# Altium PCB HVPowerModule_Old.PcbDoc
Units mm, origin at the board's own origin, x right, y up, seen from the top; angles counter-clockwise.
Board outline 55 x 90 mm, 2 copper layers (Top Layer, Bottom Layer); 63 components, 34 nets, 257 pads, 461 vias.
Unrouted connection lines stored in the file: 2.
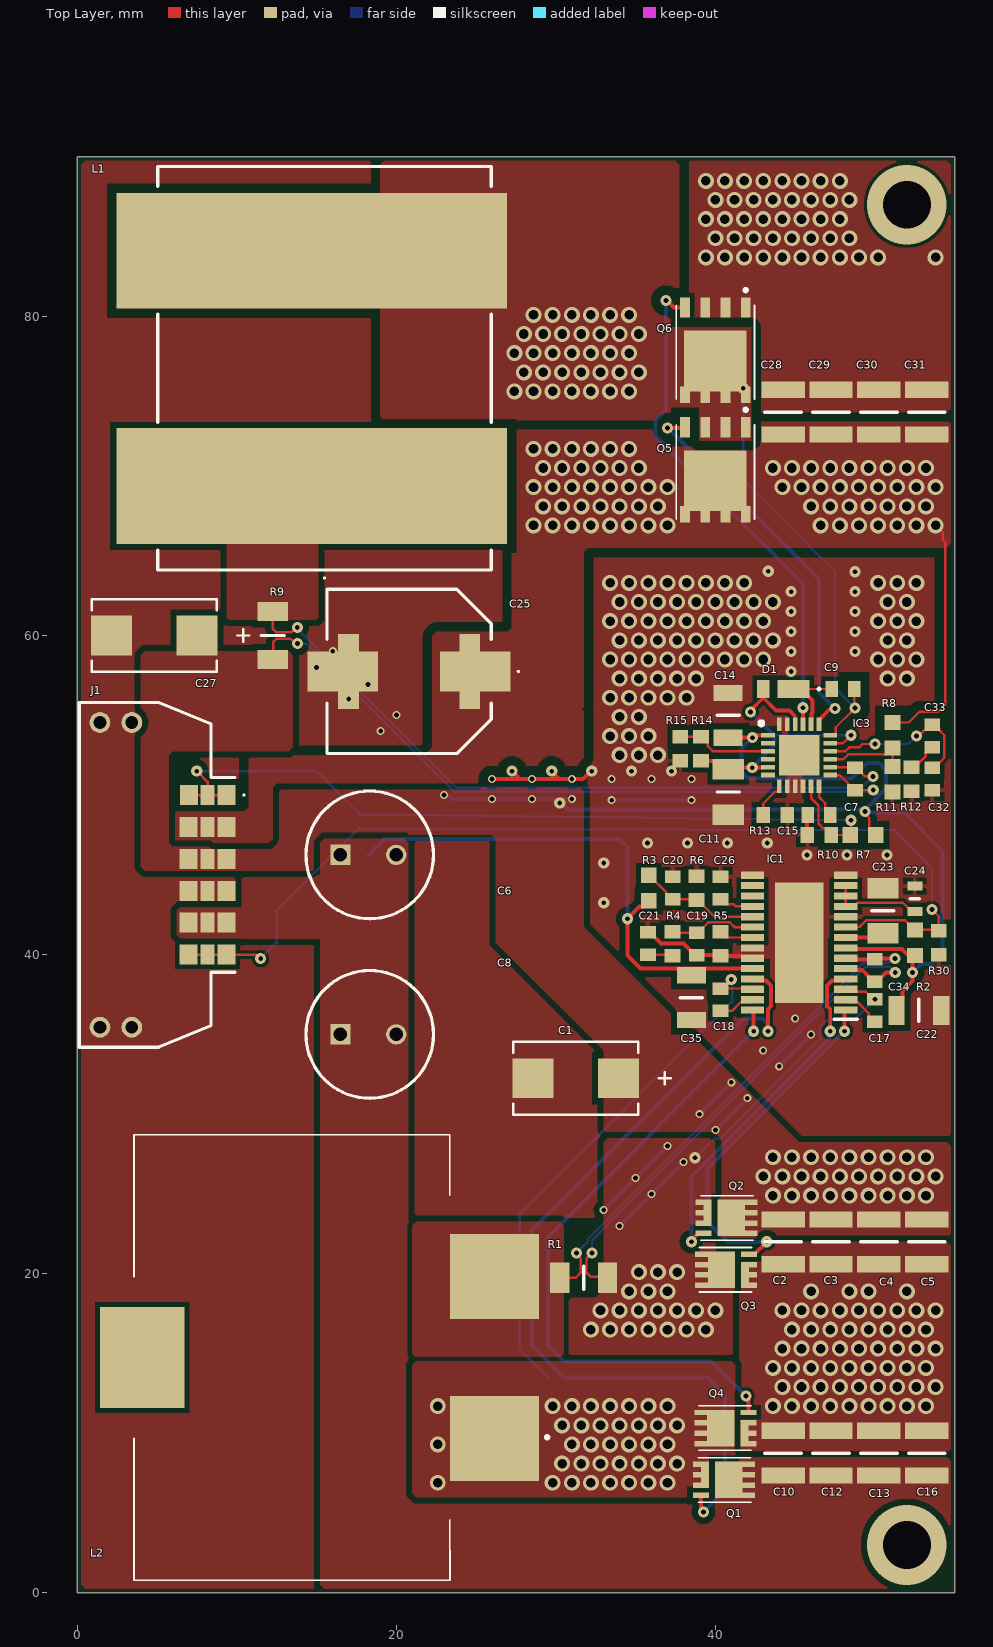
[diagram p0: Top Layer view]
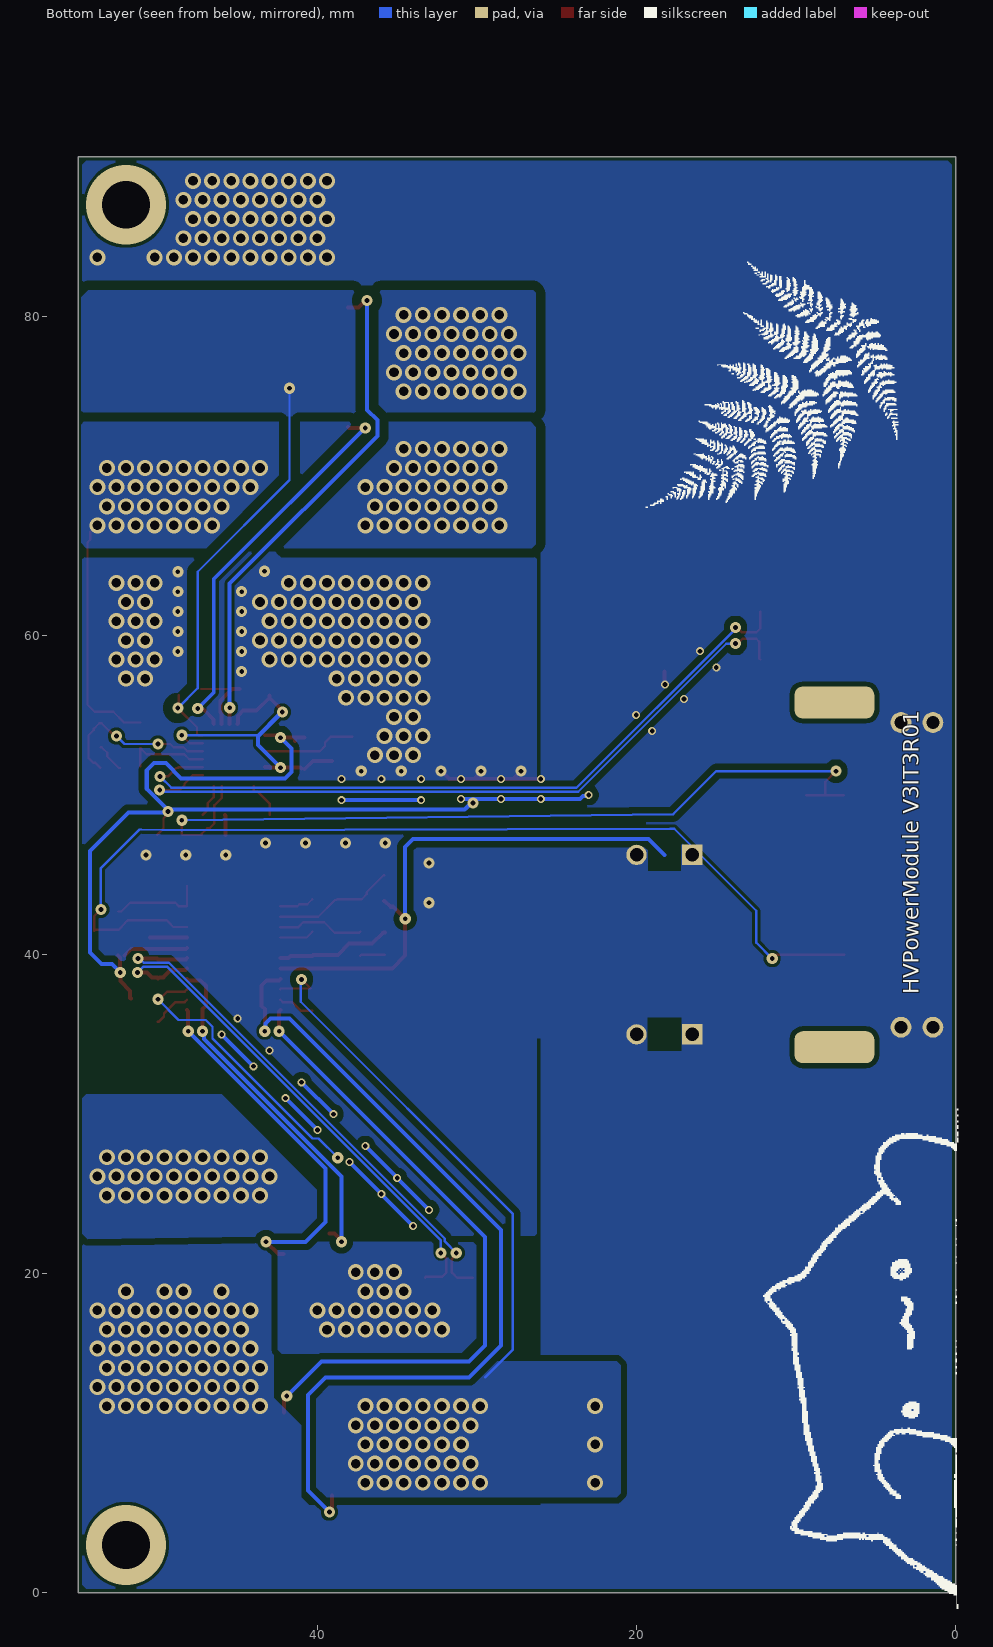
[diagram p1: Bottom Layer view, seen from below]
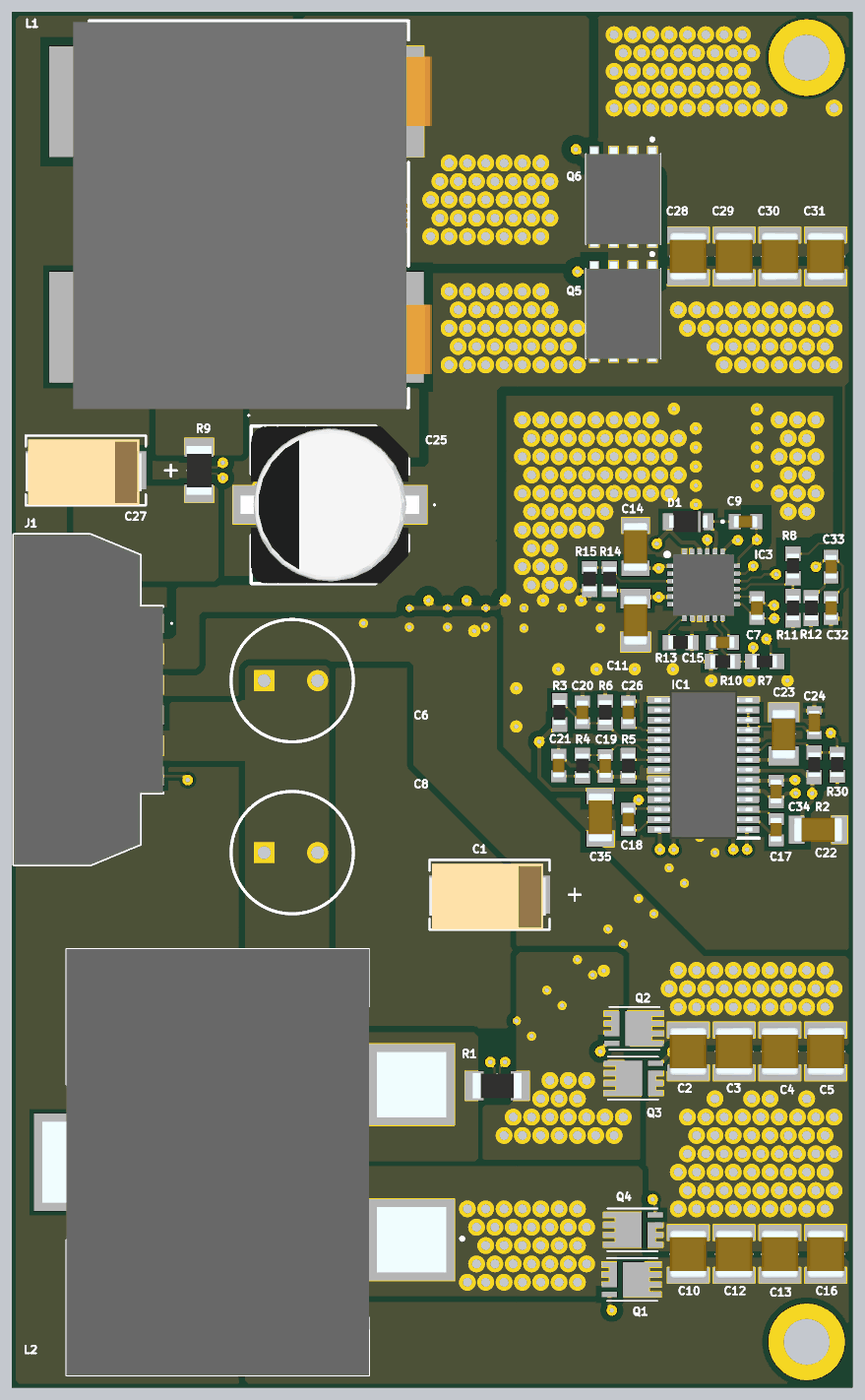
[diagram p2: 3D render of the assembled board from above, using the file's embedded part models]

## Layer stack, top to bottom
Top Solder: solder mask 0.0102, Solder Resist, Dk 3.5
Top Layer: signal copper 0.0356
Dielectric 1: dielectric 0.32, FR-4, Dk 4.8
Bottom Layer: signal copper 0.0356
Bottom Solder: solder mask 0.0102, Solder Resist, Dk 3.5

## Board outline
0,0 55,0 55,90 0,90

## Design rules (kind name [scope] priority, off if disabled: settings)
Clearance "Plane Clearance" [InNamedPolygon('PLANE')] p1: gap=0.8 ignorepadtopadclearanceinfootprint=TRUE
Clearance "High voltage Clearance 1" [InNetClass('HV1') vs Not InNetClass('HV2')] p2: gap=0.4 ignorepadtopadclearanceinfootprint=TRUE except(0.1: Arc-Text Track-Text SMDPad-Text THPad-Text Via-Text Fill-Text Poly-Text Region-Text Text-Text Text-Hole; 0.2: Arc-Arc Arc-Track Arc-SMDPad Arc-THPad Arc-Via Arc-Hole Track-Track Track-SMDPad Track-THPad Track-Via Track-Hole SMDPad-SMDPad SMDPad-THPad SMDPad-Via SMDPad-Hole THPad-THPad THPad-Via THPad-Hole Via-Via Via-Hole)
Clearance "High High voltage Clearance 1" [InNetClass('HHV1') vs Not InNetClass('HHV2')] p3: gap=0.6 ignorepadtopadclearanceinfootprint=TRUE except(0.1: Arc-Text Track-Text SMDPad-Text THPad-Text Via-Text Fill-Text Poly-Text Region-Text Text-Text Text-Hole; 0.2: Arc-SMDPad Arc-THPad Track-SMDPad Track-THPad SMDPad-SMDPad SMDPad-THPad THPad-THPad; 0.3: Arc-Arc Arc-Track Track-Track; 0.4: Arc-Via Arc-Hole Track-Via Track-Hole SMDPad-Via SMDPad-Hole THPad-Via THPad-Hole Via-Via Via-Hole)
Clearance "High High voltage Clearance 2" [InNetClass('HHV2') vs Not InNetClass('HHV1')] p4: gap=0.6 ignorepadtopadclearanceinfootprint=TRUE except(0.1: Arc-Text Track-Text SMDPad-Text THPad-Text Via-Text Fill-Text Poly-Text Region-Text Text-Text Text-Hole; 0.2: Arc-SMDPad Arc-THPad Track-SMDPad Track-THPad SMDPad-SMDPad SMDPad-THPad THPad-THPad; 0.3: Arc-Arc Arc-Track Track-Track; 0.4: Arc-Via Arc-Hole Track-Via Track-Hole SMDPad-Via SMDPad-Hole THPad-Via THPad-Hole Via-Via Via-Hole)
Clearance "High voltage Clearance 2" [InNetClass('HV2') vs Not InNetClass('HV1')] p5: gap=0.4 ignorepadtopadclearanceinfootprint=TRUE except(0.1: Arc-Text Track-Text SMDPad-Text THPad-Text Via-Text Fill-Text Poly-Text Region-Text Text-Text; 0.2: Arc-Arc Arc-Track Arc-SMDPad Arc-THPad Arc-Via Arc-Hole Track-Track Track-SMDPad Track-THPad Track-Via Track-Hole SMDPad-SMDPad SMDPad-THPad SMDPad-Via SMDPad-Hole THPad-THPad THPad-Via THPad-Hole Via-Via Via-Hole Text-Hole)
Clearance [All] p6: gap=0.1 ignorepadtopadclearanceinfootprint=TRUE except(0.2: Arc-Fill Arc-Poly Arc-Region Track-Fill Track-Poly Track-Region Via-Fill Via-Poly Via-Region; 0.3: SMDPad-Fill SMDPad-Poly SMDPad-Region THPad-Fill THPad-Poly THPad-Region Fill-Fill Fill-Poly Fill-Region Poly-Poly Poly-Region Region-Region)
HoleSize [All] p1: absolutevalues=TRUE maxlimit=5 minlimit=0.2 maxpercent=80.000 minpercent=20.000
HoleToHoleClearance [All] p1: gap=0.4 allowstackedmicrovias=TRUE
MinimumSolderMaskSliver [All] p1: minsoldermaskwidth=0.05
PlaneConnect [All] p1: planeconnectstyle=Direct reliefexpansion=0.508 reliefentries=4 reliefconductorwidth=0.254 reliefairgap=0.254
PolygonConnect [HasFootprint('*C1608*')] p1: connectstyle=Relief reliefconductorwidth=0.254 reliefentries=4 polygonreliefangle="90 Angle" airgapwidth=0.254
PolygonConnect PolygonConnect_1 [All] p2: connectstyle=Direct reliefconductorwidth=0.254 reliefentries=4 polygonreliefangle="90 Angle" airgapwidth=0.254
RoomDefinition Module [InComponentClass('Module')] p1: confinementstyle=ConfineIn formatcopy=TRUE lockcomponents=FALSE outline -3.25,-1 57.75,-1 57.75,92.75 -3.25,92.75
RoomDefinition 48V [InComponentClass('48V')] p2: confinementstyle=ConfineIn formatcopy=TRUE lockcomponents=FALSE outline -3,-1.5 57.5,-1.5 57.5,92.5 -3,92.5
RoomDefinition 24V [InComponentClass('24V')] p3: confinementstyle=ConfineIn formatcopy=TRUE lockcomponents=FALSE outline -3.25,-1.25 57.5,-1.25 57.5,92.5 -3.25,92.5
RoutingVias [All] p1: holewidth=0.711 width=1.27 viastyle="Through Hole" minholewidth=0.2 minwidth=0.4 maxholewidth=0.711 maxwidth=1.27
SilkToSilkClearance [All] p1: silktosilkclearance=0.2
SilkToSolderMaskClearance [IsPad] p1: minsilkscreentomaskgap=0.1 clearancetoexposedcopper=TRUE
SolderMaskExpansion [All] p1: expansion=0.05 istentingtop=FALSE
Width [All] p1: maxlimit=2 minlimit=0.1 preferedwidth=0.254
24 further rules are at their usual default settings.

## Classes and differential pairs
net class HV2: LSN S+
component class 48V: C7 C9 C11 C14 C15 C25 C27 C28 C29 C30 C31 C32 C33 D1 IC3 L1 Q5 Q6 R7 R8 R9 R10 R11 R12 R13 R14 R15
net class HHV2: 48V SW
net class HV1: 24V 48V_CTRL SW1 SW2 V_bat
component class Module: J1
component class 24V: C1 C2 C3 C4 C5 C6 C8 C10 C12 C13 C16 C17 C18 C19 C20 C21 C22 C23 C24 C26 C34 C35 IC1 L2 Q1 Q2 Q3 Q4 R1 R2 R3 R4 R5 R6 R30

## Components (designator, comment, footprint, x,y, rotation, side; value= is the part's Value field where it differs from the comment)
C1 "T598D336M035ATE065" CAPMP7.6X4.3_3.1N_KEM 31.25,32.25 r180 top value=33u
C2 "CGA6P1X7R1N106M250AC" CAPC3225X280N 44.25,22 r90 top value=10u
C3 "CGA6P1X7R1N106M250AC" CAPC3225X280N 47.25,22 r90 top value=10u
C4 "CGA6P1X7R1N106M250AC" CAPC3225X280N 50.25,22 r90 top value=10u
C5 "CGA6P1X7R1N106M250AC" CAPC3225X280N 53.25,22 r90 top value=10u
C6 "A750MW687M1VAAE018" CAPPRD500W65D1000H1800 18.25,46.25 r0 top value=680u
C7 "C0603C102J5RACTU" CAPC1608X95N 48.75,51 r90 top value=1n
C8 "A750MW687M1VAAE018" CAPPRD500W65D1000H1800 18.25,35 r0 top value=680u
C9 "C0603C104K5RACTU" CAPC1608X95N 48,56.65 r0 top value=100n
C10 "CGA6P1X7R1N106M250AC" CAPC3225X280N 44.25,8.75 r270 top value=10u
C11 "C1206X475M5RACAUTO" CAPC3316X195N 40.8,50.2 r270 top value=4.7uF
C12 "CGA6P1X7R1N106M250AC" CAPC3225X280N 47.25,8.75 r270 top value=10u
C13 "CGA6P1X7R1N106M250AC" CAPC3225X280N 50.25,8.75 r270 top value=10u
C14 "C1206C105M5RECTU" CAPC3216X130N 40.8,55 r90 top value=1uF
C15 "C0603C104K5RACTU" CAPC1608X95N 46.5,48.75 r180 top value=100n
C16 "CGA6P1X7R1N106M250AC" CAPC3225X280N 53.25,8.75 r270 top value=10u
C17 "C0603C104K5RACTU" CAPC1608X95N 50,36.5 r90 top value=100n
C18 "C0603C104K5RACTU" CAPC1608X95N 40.325,37.175 r270 top value=100n
C19 "C0603C689C5GACTU" CAPC1608X87N 38.825,40.675 r90 top value=6.8p
C20 "C0603C221K5RACTU" CAPC1608X87N 37.325,44.175 r270 top value=220p
C21 "C0603C102J5RACTU" CAPC1608X95N 35.775,40.7 r270 top value=1n
C22 "C1206C105M5RECTU" CAPC3216X130N 52.75,36.5 r0 top value=1uF
C23 "C1206X475M5RACAUTO" CAPC3316X195N 50.5,42.75 r90 top value=4.7uF
C24 "C0603C474K4PACTU" CAPC1608X90N 52.5,43.5 r90 top value=470n
C25 "EEH-ZS1J181UV" Hybrid_G_VP 20.8,57.75 r90 top
C26 "C0603C104K5RACTU" CAPC1608X95N 40.325,44.175 r270 top value=100n
C27 "T598D336M035ATE065" CAPMP7.6X4.3_3.1N_KEM 4.828,60 r180 top value=33u
C28 "CGA6P1X7R1N106M250AC" CAPC3225X280N 44.25,74 r270 top value=10u
C29 "CGA6P1X7R1N106M250AC" CAPC3225X280N 47.25,74 r270 top value=10u
C30 "CGA6P1X7R1N106M250AC" CAPC3225X280N 50.25,74 r270 top value=10u
C31 "CGA6P1X7R1N106M250AC" CAPC3225X280N 53.25,74 r270 top value=10u
C32 "C0603C221K5RACTU" CAPC1608X87N 53.6,51 r270 top value=220p
C33 "C0603C682K5RAC7411" CAPC1608X87N 53.6,53.7 r270 top value=6.8n
C34 "C0603C102J5RACTU" CAPC1608X95N 50,39 r270 top value=1n
C35 "C1206C105M5RECTU" CAPC3216X130N 38.5,37.3 r270 top value=1uF
D1 "RF05VYM1SFHTR" RF05VYM1SFHTR 44.25,56.65 r270 top
IC1 "LT8392JFE#PBF" SOP65P640X120-29N 45.25,40.75 r180 top
IC3 "LTC3769EUF#PBF" QFN50P400X400X80-25N-D 45.25,52.5 r0 top
J1 "UMPT-06-01-L-RA-WT-M-TR" UMPT0601LRAWTMTR 5,45 r270 top locked
L1 "B82559A9203A025" B82559A9203A025 15.5,76.75 r90 top value=20u
L2 "PQ2614BHA-100K" PQ2614BLA1R0K 15.5,14.75 r90 top value=10u
Q1 "BSZ034N04LS" BSZ060NE2LS 41.216,7.078 r180 top
Q2 "BSZ034N04LS" BSZ060NE2LS 41.37,23.5 r180 top
Q3 "BSZ034N04LS" BSZ060NE2LS 40,20.25 r0 top
Q4 "BSZ034N04LS" BSZ060NE2LS 39.966,10.328 r0 top
Q5 "SiR880ADP" SI7141DPT1GE3 40,70.25 r270 top
Q6 "SiR880ADP" SI7141DPT1GE3 40,77.75 r270 top
R1 "PCS1206FR0030ET" RESC3216X68N 31.75,19.75 r180 top value=3m
R2 "CRCW0603100KJNEAC" RESC1608X55N 52.5,40.75 r270 top value=100k
R3 "CRCW0603100KJNEAC" RESC1608X55N 35.825,44.175 r270 top value=100k
R4 "CRCW0603255KFKEAC" RESC1608X50N 37.325,40.675 r90 top value=255k
R5 "CRCW0603316KFKTA" RESC1608X50N 40.325,40.675 r90 top value=316k
R6 "CRCW06034K32FKEA" RESC1608X50N 38.825,44.175 r90 top value=4.32k
R7 "CRCW0603100KJNEAC" RESC1608X55N 49.25,47.5 r0 top value=100k
R8 "CRCW0603100KJNEAC" RESC1608X55N 51.1,53.75 r90 top value=100k
R9 "PCS1206FR0030ET" RESC3216X68N 12.25,60 r90 top value=3m
R10 "CRCW06038K87FKTA" RESC1608X50N 46.5,47.5 r0 top value=8.87k
R11 "CRCW06032K55FKTA" RESC1608X55N 51.1,51 r90 top value=2.55k
R12 "CRCW060315K8FKTA" RESC1608X50N 52.3,51 r270 top value=15.8k
R13 "CRCW060326K7FKEB" RESC1608X50N 43.75,48.75 r180 top value=8.87k
R14 "CRCW06030000Z0EAHP" RESC1608X50N 39.1,52.9 r270 top
R15 "CRCW06030000Z0EAHP" RESC1608X50N 37.8,52.9 r270 top
R30 "CRCW06038K87FKEA" RESC1608X50N 54,40.75 r90 top value=8.87k

## Footprints (in the part's own frame and the unit in brackets; to place one, negate y for a bottom-side part, rotate by r counter-clockwise, add the part's x,y. Pads: shape width x height; smd on the part's side, far side on the other; paste and mask are expansions set on the pad)
B82559A9203A025 [mm]
  rect 7.25x24.5 smd: 1(-7.375,0.8) 2(7.375,0.8)
  silkscreen extent -13.2,-10.45 12.65,10.45, body extent -12.73,-12 12.57,11.5, height 14.9
BSZ060NE2LS [mm]
  rect 0.8x0.34 smd: 1(-0.87,0.975) 2(-0.87,0.325) 3(-0.87,-0.325) 4(-0.87,-0.975)
  rect 1.71x2.29 smd: 1(0.38,0)
  rect 0.5x0.34 smd: 5(1.87,-0.65) 5(1.87,0)
  rect 1x0.34 smd: 5(2.12,-0.975) 6(2.12,-0.325) 7(2.12,0.325) 8(2.12,0.975)
  silkscreen extent -1.02,-1.4 2.29,1.4
CAPC1608X87N [mm]
  rect 0.78x0.98 smd: 1(-0.7,0) 2(0.7,0)
  body extent -0.8,-0.4 0.8,0.4, height 0.87
CAPC1608X90N [mm]
  rect 0.54x0.94 smd: 1(-0.8,0) 2(0.8,0)
  silkscreen extent 0,-0.3 0,0.3, body extent -0.8,-0.4 0.8,0.4, height 0.9
CAPC1608X95N [mm]
  rect 0.78x0.98 smd: 1(-0.7,0) 2(0.7,0)
  body extent -0.8,-0.4 0.8,0.4, height 0.95
CAPC3216X130N [mm]
  rect 1.02x1.82 smd: 1(-1.4,0) 2(1.4,0)
  silkscreen extent 0,-0.7 0,0.7, body extent -1.6,-0.8 1.6,0.8, height 1.3
CAPC3225X280N [mm]
  rect 1.02x2.72 smd: 1(-1.4,0) 2(1.4,0)
  silkscreen extent 0,-1.15 0,1.15, body extent -1.6,-1.25 1.6,1.25, height 2.8
CAPC3316X195N [mm]
  rect 1.28x1.96 smd: 1(-1.42,0) 2(1.42,0)
  silkscreen extent 0,-0.7 0,0.7, body extent -1.65,-0.8 1.65,0.8, height 1.95
CAPMP7.6X4.3_3.1N_KEM [mm]
  rect 2.56x2.5 smd paste+0 mask+0: 1(-2.672,0) 2(2.672,0)
  silkscreen extent -5.95,-2.28 3.93,2.28, body extent -3.67,-2.02 3.93,2.28, height 3.15
CAPPRD500W65D1000H1800 [mm]
  rect 1.275x1.275 hole 0.85: 1(-1.75,0)
  round 1.275 hole 0.85: 2(1.75,0)
  silkscreen extent -3.91,-4 4.09,4
Hybrid_G_VP [mm]
  rect 2.5x1.2 smd: 1(0,-2.55) 2(0,2.55)
  rect 4.7x1.3 smd: 1(0,-3.8) 2(0,3.8)
  rect 2.5x1.9 smd: 1(0,-5.4) 2(0,5.4)
  silkscreen extent -5.15,-6.9 5.15,5.15, body extent -5.15,-5.85 5.15,5.85, height 10.59
PQ2614BLA1R0K [mm]
  rect 5.33x5.59 smd: 1(-5.075,-10.655) 2(5.075,-10.655)
  rect 6.35x5.28 smd: MP1(0,11.42)
  silkscreen extent -13.95,-14.06 13.95,11.94, body extent -13.95,-12.92 13.95,13.53, height 16.1
QFN50P400X400X80-25N-D [mm]
  rect 0.85x0.3 smd mask+0.04: 1(-1.95,1.25) 6(-1.95,-1.25) 13(1.95,-1.25) 18(1.95,1.25)
  rect 0.85x0.3 smd: 2(-1.95,0.75) 3(-1.95,0.25) 4(-1.95,-0.25) 5(-1.95,-0.75) 14(1.95,-0.75) 15(1.95,-0.25) 16(1.95,0.25) 17(1.95,0.75)
  rect 0.3x0.85 smd mask+0.04: 7(-1.25,-1.95) 12(1.25,-1.95) 19(1.25,1.95) 24(-1.25,1.95)
  rect 0.3x0.85 smd: 8(-0.75,-1.95) 9(-0.25,-1.95) 10(0.25,-1.95) 11(0.75,-1.95) 20(0.75,1.95) 21(0.25,1.95) 22(-0.25,1.95) 23(-0.75,1.95)
  rect 2.55x2.55 smd: 25(0,0)
  silkscreen extent -2.5,1.88 -2.25,2.12, body extent -2.05,-2.05 2.05,2.05, height 0.8
RESC1608X50N [mm]
  rect 0.85x1 smd: 1(-0.75,0) 2(0.75,0)
  body extent -0.79,-0.43 0.79,0.43, height 0.5
RESC1608X55N [mm]
  rect 0.95x1 smd: 1(-0.8,0) 2(0.8,0)
  body extent -0.8,-0.4 0.8,0.4, height 0.55
RESC3216X68N [mm]
  rect 1.2x1.9 smd: 1(-1.5,0) 2(1.5,0)
  silkscreen extent 0,-0.72 0,0.72, body extent -1.6,-0.82 1.6,0.82, height 0.68
RF05VYM1SFHTR [mm]
  rect 1.1x2 smd: 1(0,0.65)
  rect 1.1x0.8 smd: 2(0,-1.25)
  silkscreen extent -0.05,2.2 0.05,2.3, body extent -0.7,-1.25 0.7,1.25, height 0.8
SI7141DPT1GE3 [mm]
  rect 1.27x0.61 smd: 1(-2.81,1.905) 2(-2.81,0.635) 3(-2.81,-0.635) 4(-2.81,-1.905)
  rect 0.71x0.61 smd: 5(2.81,-1.905) 6(2.81,-0.635) 7(2.81,0.635) 8(2.81,1.905)
  rect 3.81x3.91 smd: 9(0.55,0)
  rect 0.32x0.255 smd: 9(2.3,2.083) 9(2.3,-2.083)
  silkscreen extent -4,-2.45 2.95,2.45, body extent -3.38,-2.45 3.1,2.45, height 1.22
SOP65P640X120-29N [mm]
  rect 1.45x0.45 smd: 1(-2.925,4.225) 2(-2.925,3.575) 3(-2.925,2.925) 4(-2.925,2.275) 5(-2.925,1.625) 6(-2.925,0.975) 7(-2.925,0.325) 8(-2.925,-0.325) 9(-2.925,-0.975) 10(-2.925,-1.625) 11(-2.925,-2.275) 12(-2.925,-2.925) 13(-2.925,-3.575) 14(-2.925,-4.225) 15(2.925,-4.225) 16(2.925,-3.575) 17(2.925,-2.925) 18(2.925,-2.275) 19(2.925,-1.625) 20(2.925,-0.975) 21(2.925,-0.325) 22(2.925,0.325) 23(2.925,0.975) 24(2.925,1.625) 25(2.925,2.275) 26(2.925,2.925) 27(2.925,3.575) 28(2.925,4.225)
  rect 3.05x7.56 smd: 29(0,0)
  silkscreen extent -3.65,4.8 -2.2,4.8, body extent -3.2,-4.85 3.2,4.85, height 1.2
UMPT0601LRAWTMTR [mm]
  rect 1.25x1.12 smd: 1(-5,2) 1(-5,4.365) 2(-3,4.365) 2(-3,1.985) 3(-1,4.365) 3(-1,1.985) 4(1,4.365) 4(1,1.985) 5(3,4.365) 5(3,1.985) 6(5,1.985) 6(5,4.365)
  rect 1.25x0.86 smd: 1(-5,3.175) 2(-3,3.175) 3(-1,3.175) 4(1,3.175) 5(3,3.175) 6(5,3.175)
  round 1.3 hole 0.8: MH(-9.55,-3.575) MH(-9.55,-1.575) MH(9.55,-3.575) MH(9.55,-1.575)
  silkscreen extent -10.8,-4.87 10.8,5.5, body extent -10.8,-4.87 10.8,4.87, height 9.8

## Part data
C1 C27: "No Description Available", Supplier Part Number 1=80-T598D336M35E65, Built_By=EMA_Frank, Copyright="Copyright (C) 2018 Accelerated Designs. All rights reserved", Manufacturer_Part_Number=T598D336M035ATE065, RefDes=RefDes, Source_Library=Kemet_2020-03-25_3.xlr, SourceLibrary=Kemet_2020-03-25_3, Supplier 1=Mouser, Type=DEV, Vendor=Kemet
C2 C3 C4 C5 C10 C12 C13 C16 C28 C29 C30 C31: "Capacitor", Manufacturer_Name=TDK, Mouser Part Number=810-CGA6P1X7R1N106M, Arrow Part Number=CGA6P1X7R1N106M250AC, Arrow Price/Stock=https://www.arrow.com/en/products/cga6p1x7r1n106m250ac/tdk, Datasheet Link=https://product.tdk.com/system/files/dam/doc/product/capacitor/ceramic/mlcc/catalog/mlcc_automotive_general_en.pdf, Height=2.8mm, Manufacturer_Part_Number=CGA6P1X7R1N106M250AC, Mouser Price/Stock=https://www.mouser.co.uk/ProductDetail/TDK/CGA6P1X7R1N106M250AC?qs=gZXFycFWdANNyXbiENuK8Q%3D%3D, Supplier 1=Mouser, Supplier Part Number 1=810-CGA6P1X7R1N106M
C6 C8: "Capacitor Polarised", Manufacturer_Name=Kemet, Supplier Part Number 1=80-A750MW687M1VAAE18, Datasheet Link=https://www.kemet.com/specsheet/A750MW687M1VAAE018, Height=18mm, Manufacturer_Part_Number=A750MW687M1VAAE018, Supplier 1=Mouser
C7 C21 C34: library part C0603C104K5RACTU, "Capacitor", Manufacturer_Name=Kemet, Mouser Part Number=80-C0603C104K5R, Supplier Part Number 1=80-C0603C102J5R, Arrow Part Number=C0603C104K5RACTU, Arrow Price/Stock=https://www.arrow.com/en/products/c0603c104k5ractu/kemet-corporation, Datasheet Link=http://www.farnell.com/datasheets/2205446.pdf, Height=0.95mm, Manufacturer_Part_Number=C0603C104K5RACTU, Mouser Price/Stock=https://www.mouser.co.uk/ProductDetail/KEMET/C0603C104K5RACTU?qs=l5k%252BbMnNDkkVcnZPSAaaiQ%3D%3D, Supplier 1=Mouser
C9 C15 C17 C18 C26: "Capacitor", Manufacturer_Name=Kemet, Mouser Part Number=80-C0603C104K5R, Arrow Part Number=C0603C104K5RACTU, Arrow Price/Stock=https://www.arrow.com/en/products/c0603c104k5ractu/kemet-corporation, Datasheet Link=http://www.farnell.com/datasheets/2205446.pdf, Height=0.95mm, Manufacturer_Part_Number=C0603C104K5RACTU, Mouser Price/Stock=https://www.mouser.co.uk/ProductDetail/KEMET/C0603C104K5RACTU?qs=l5k%252BbMnNDkkVcnZPSAaaiQ%3D%3D, Supplier 1=Mouser, Supplier Part Number 1=80-C0603C104K5R
C11 C23: "Capacitor", Manufacturer_Name=Kemet, Mouser Part Number=80-C1206X475M5RAUTO, Datasheet Link=https://www.kemet.com/specsheet/C1206X475M5RACAUTO, Height=1.95mm, Manufacturer_Part_Number=C1206X475M5RACAUTO, Mouser Price/Stock=https://www.mouser.co.uk/ProductDetail/KEMET/C1206X475M5RACAUTO?qs=%252B6g0mu59x7LXtOZABrHA3A%3D%3D, Supplier 1=Mouser, Supplier Part Number 1=80-C1206X475M5RAUTO
C14 C22 C35: "Capacitor", Manufacturer_Name=Kemet, Mouser Part Number=80-C1206C105M5RECTU, Arrow Part Number=C1206C105M5RECTU, Arrow Price/Stock=https://www.arrow.com/en/products/c1206c105m5rectu/kemet-corporation, Datasheet Link=https://content.kemet.com/datasheets/KEM_C1090_X7R_ESD.pdf, Height=1.3mm, Manufacturer_Part_Number=C1206C105M5RECTU, Mouser Price/Stock=https://www.mouser.co.uk/ProductDetail/KEMET/C1206C105M5RECTU?qs=55YtniHzbhBh39CxZCw85g%3D%3D, Supplier 1=Mouser, Supplier Part Number 1=80-C1206C105M5RECTU
C19: "Capacitor", Manufacturer_Name=Kemet, Mouser Part Number=80-C0603C689C5G, Arrow Part Number=C0603C689C5GACTU, Arrow Price/Stock=https://www.arrow.com/en/products/c0603c689c5gactu/kemet-corporation, Datasheet Link=https://datasheet.datasheetarchive.com/originals/distributors/SFDatasheet-4/sf-00083929.pdf, Height=0.87mm, Manufacturer_Part_Number=C0603C689C5GACTU, Mouser Price/Stock=https://www.mouser.com/Search/Refine.aspx?Keyword=80-C0603C689C5G, Supplier 1=Mouser, Supplier Part Number 1=80-C0603C689C5G
C20 C32: "Capacitor", Manufacturer_Name=Kemet, Mouser Part Number=80-C0603C221K5R, Arrow Part Number=C0603C221K5RACTU, Arrow Price/Stock=https://www.arrow.com/en/products/c0603c221k5ractu/kemet-corporation, Datasheet Link=https://componentsearchengine.com/Datasheets/2/C0603C221K5RACTU.pdf, Height=0.87mm, Manufacturer_Part_Number=C0603C221K5RACTU, Mouser Price/Stock=https://www.mouser.co.uk/ProductDetail/KEMET/C0603C221K5RACTU?qs=mvqbjrnDhCzYtgiRXquOuQ%3D%3D, Supplier 1=Mouser, Supplier Part Number 1=80-C0603C221K5R
C24: "Capacitor", Manufacturer_Name=Kemet, Mouser Part Number=80-C0603C474K4P, Arrow Part Number=C0603C474K4PACTU, Arrow Price/Stock=https://www.arrow.com/en/products/c0603c474k4pactu/kemet-corporation?region=nac, Datasheet Link=https://www.kemet.com/specsheet/C0603C474K4PACTU, Height=0.9mm, Manufacturer_Part_Number=C0603C474K4PACTU, Mouser Price/Stock=https://www.mouser.co.uk/ProductDetail/KEMET/C0603C474K4PACTU?qs=IOSO19fP00rNDeTfy1w%2Frw%3D%3D, Supplier 1=Mouser, Supplier Part Number 1=80-C0603C474K4P
C25: "Capacitor Polarised", Manufacturer_Name=Panasonic, Mouser Part Number=667-EEH-ZS1J181UV, Datasheet Link=http://industrial.panasonic.com/cdbs/www-data/pdf/RDD0000/ast-ind-156941.pdf, Manufacturer_Part_Number=EEH-ZS1J181UV, Mouser Price/Stock=https://www.mouser.co.uk/ProductDetail/Panasonic/EEH-ZS1J181UV?qs=Jslch3jnSjkh5oj9yayqEA%3D%3D, Supplier 1=Mouser, Supplier Part Number 1=667-EEH-ZS1J181UV
C33: "Capacitor", Manufacturer_Name=Kemet, Mouser Part Number=80-C0603C682K5RLR, Datasheet Link=https://www.kemet.com/specsheet/C0603C682K5RAC7411, Height=0.87mm, Manufacturer_Part_Number=C0603C682K5RAC7411, Mouser Price/Stock=https://www.mouser.com/Search/Refine.aspx?Keyword=80-C0603C682K5RLR, Supplier 1=Mouser, Supplier Part Number 1=80-C0603C682K5RLR
D1: "Diode", Manufacturer_Name="ROHM Semiconductor", Mouser Part Number=755-RF05VYM1SFHTR, Datasheet Link=https://fscdn.rohm.com/en/products/databook/datasheet/discrete/diode/fast_recovery/rf05vym1sfh.pdf, Height=0.8mm, Manufacturer_Part_Number=RF05VYM1SFHTR, Mouser Price/Stock=https://www.mouser.co.uk/ProductDetail/ROHM-Semiconductor/RF05VYM1SFHTR?qs=4v%252BiZTmLVHEBI5apodawUw%3D%3D, Supplier 1=Mouser, Supplier Part Number 1=755-RF05VYM1SFHTR
IC1: "Integrated Circuit", Manufacturer_Name="Analog Devices", Mouser Part Number=584-LT8392JFE#PBF, Datasheet Link=https://www.mouser.co.uk/datasheet/2/609/lt8392-1921917.pdf, Height=1.2mm, Manufacturer_Part_Number=LT8392JFE#PBF, Mouser Price/Stock=https://www.mouser.co.uk/ProductDetail/Analog-Devices/LT8392JFEPBF?qs=zW32dvEIR3v19WKL6cpYug%3D%3D, Supplier 1=Mouser, Supplier Part Number 1=584-LT8392JFE#PBF
IC3: "Integrated Circuit", Manufacturer_Name="Linear Technology", Mouser Part Number=584-LTC3769EUF#PBF, Datasheet Link=http://www.linear.com/docs/45120, Height=0.8mm, Manufacturer_Part_Number=LTC3769EUF#PBF, Mouser Price/Stock=https://www.mouser.com/Search/Refine.aspx?Keyword=584-LTC3769EUF%23PBF, Supplier 1=Mouser, Supplier Part Number 1=584-LTC3769EUF#PBF
J1: "Connector", Manufacturer_Name=SAMTEC, Mouser Part Number=200-UMPT0601LRAWTMTR, Datasheet Link=https://suddendocs.samtec.com/prints/umpt-xx-xx-xxx-ra-xx-x-xr-footprint.pdf, Height=9.7mm, Manufacturer_Part_Number=UMPT-06-01-L-RA-WT-M-TR, Mouser Price/Stock=https://www.mouser.co.uk/ProductDetail/Samtec/UMPT-06-01-L-RA-WT-M-TR?qs=e8oIoAS2J1RQgO5NWBU6Ow%3D%3D, System=Connector
L1: "Inductor", Manufacturer_Name=TDK, Mouser Part Number=871-B82559A9203A025, Datasheet Link=https://product.tdk.com/system/files/dam/doc/product/inductor/inductor/smd/data_sheet/30/db/ind_2008/b82559_a025.pdf, Height=15mm, Manufacturer_Part_Number=B82559A9203A025, Mouser Price/Stock=https://www.mouser.co.uk/ProductDetail/EPCOS-TDK/B82559A9203A025?qs=d9Mk6%252B9NdtAJSxD26yF0NA%3D%3D, Supplier 1=Mouser, Supplier Part Number 1=871-B82559A9203A025
L2: "Inductor", Manufacturer_Name=Bourns, Mouser Part Number=652-PQ2614BHA-100K, Arrow Part Number=PQ2614BHA-100K, Arrow Price/Stock=https://www.arrow.com/en/products/pq2614bha-100k/bourns?region=nac, Datasheet Link=https://www.bourns.com/docs/Product-Datasheets/PQ2614.pdf, Height=16mm, Manufacturer_Part_Number=PQ2614BHA-100K, Mouser Price/Stock=https://www.mouser.co.uk/ProductDetail/Bourns/PQ2614BHA-100K?qs=1mbolxNpo8cus7p6tzCJzA%3D%3D, Supplier 1=Mouser, Supplier Part Number 1=652-PQ2614BHA-100K
Q1 Q2 Q3 Q4: "MOSFET (N-Channel)", Manufacturer_Name=Infineon, Mouser Part Number=726-BSZ034N04LS, Datasheet Link=https://www.infineon.com/dgdl/Infineon-BSZ034N04LS-DS-v02_01-EN.pdf?fileId=db3a304342371bb001424c3fe5bc7083, Manufacturer_Part_Number=BSZ034N04LS, Mouser Price/Stock=https://www.mouser.co.uk/ProductDetail/Infineon-Technologies/BSZ034N04LS?qs=y2kkmE52mdOs9jAiLVqcEw%3D%3D, Supplier 1=Mouser, Supplier Part Number 1=726-BSZ034N04LS
Q5 Q6: library part SIR186LDP-T1-RE3, "MOSFET (N-Channel)", Manufacturer_Name=Vishay, Mouser Part Number=78-SIR186LDP-T1-RE3, Supplier Part Number 1=78-SIR880ADP-T1-GE3, Datasheet Link=https://www.vishay.com/docs/63001/sir186ldp.pdf, Height=1.12mm, Manufacturer_Part_Number=SIR186LDP-T1-RE3, Mouser Price/Stock=https://www.mouser.co.uk/ProductDetail/Vishay-Siliconix/SIR186LDP-T1-RE3?qs=DRkmTr78QARDP5ccYhKFzw%3D%3D, Supplier 1=Mouser
R1 R9: "Resistor", Manufacturer_Name=Ohmite, Mouser Part Number=588-PCS1206FR0030ET, Datasheet Link=https://componentsearchengine.com/Datasheets/2/PCS1206FR0030ET.pdf, Height=0.684mm, Manufacturer_Part_Number=PCS1206FR0030ET, Mouser Price/Stock=https://www.mouser.co.uk/ProductDetail/Ohmite/PCS1206FR0030ET?qs=Zz7%252BYVVL6bGHVp6IC0W8ig%3D%3D, Supplier 1=Mouser, Supplier Part Number 1=588-PCS1206FR0030ET
R2 R3 R7 R8: library part CRCW0603100KFKEAC, "Resistor", Manufacturer_Name=Vishay, Mouser Part Number=71-CRCW0603100KFKEAC, Supplier Part Number 1=71-CRCW0603100KJNEAC, Arrow Part Number=CRCW0603100KFKEAC, Arrow Price/Stock=https://www.arrow.com/en/products/crcw0603100kfkeac/vishay, Datasheet Link=https://www.mouser.com/datasheet/2/427/crcwce3-1223726.pdf, Height=0.55mm, Manufacturer_Part_Number=CRCW0603100KFKEAC, Mouser Price/Stock=https://www.mouser.co.uk/ProductDetail/Vishay-Dale/CRCW0603100KFKEAC?qs=E3Y5ESvWgWPxzfNYyMgX1w%3D%3D, Supplier 1=Mouser
R4: library part CRCW0603316KFKTA, "Resistor", Manufacturer_Name=Vishay, Mouser Part Number=71-CRCW0603-316K, Supplier Part Number 1=71-CRCW0603-255K-E3, Datasheet Link=http://www.vishay.com/docs/20035/dcrcwe3.pdf, Height=0.5mm, Manufacturer_Part_Number=CRCW0603316KFKTA, Mouser Price/Stock=https://www.mouser.co.uk/ProductDetail/Vishay-Dale/CRCW0603316KFKTA?qs=rSCQ%2F9oRLB67bniFfnYAjQ%3D%3D, Supplier 1=Mouser
R5: "Resistor", Manufacturer_Name=Vishay, Mouser Part Number=71-CRCW0603-316K, Datasheet Link=http://www.vishay.com/docs/20035/dcrcwe3.pdf, Height=0.5mm, Manufacturer_Part_Number=CRCW0603316KFKTA, Mouser Price/Stock=https://www.mouser.co.uk/ProductDetail/Vishay-Dale/CRCW0603316KFKTA?qs=rSCQ%2F9oRLB67bniFfnYAjQ%3D%3D, Supplier 1=Mouser, Supplier Part Number 1=71-CRCW0603-316K
R6: "Resistor", Manufacturer_Name=Vishay, Mouser Part Number=71-CRCW0603-4.32K-E3, Arrow Part Number=CRCW06034K32FKEA, Arrow Price/Stock=https://www.arrow.com/en/products/crcw06034k32fkea/vishay, Datasheet Link=http://www.vishay.com/docs/20035/dcrcwe3.pdf, Height=0.5mm, Manufacturer_Part_Number=CRCW06034K32FKEA, Mouser Price/Stock=https://www.mouser.com/Search/Refine.aspx?Keyword=71-CRCW0603-4.32K-E3, Supplier 1=Mouser, Supplier Part Number 1=71-CRCW0603-4.32K-E3
R10: library part CRCW06038K87FKEA, "Resistor", Manufacturer_Name=Vishay, Mouser Part Number=71-CRCW0603-8.87K-E3, Supplier Part Number 1=71-CRCW0603-8.87K, Arrow Part Number=CRCW06038K87FKEA, Arrow Price/Stock=https://www.arrow.com/en/products/crcw06038k87fkea/vishay, Datasheet Link=http://www.vishay.com/docs/20035/dcrcwe3.pdf, Height=0.5mm, Manufacturer_Part_Number=CRCW06038K87FKEA, Mouser Price/Stock=https://www.mouser.co.uk/ProductDetail/Vishay-Dale/CRCW06038K87FKEA/?qs=CuWZN%2F5Vbiq36sz1Lp02wA%3D%3D, Supplier 1=Mouser
R11: library part CRCW0603100KFKEAC, "Resistor", Manufacturer_Name=Vishay, Mouser Part Number=71-CRCW0603100KFKEAC, Supplier Part Number 1=71-CRCW0603-2.55K, Arrow Part Number=CRCW0603100KFKEAC, Arrow Price/Stock=https://www.arrow.com/en/products/crcw0603100kfkeac/vishay, Datasheet Link=https://www.mouser.com/datasheet/2/427/crcwce3-1223726.pdf, Height=0.55mm, Manufacturer_Part_Number=CRCW0603100KFKEAC, Mouser Price/Stock=https://www.mouser.co.uk/ProductDetail/Vishay-Dale/CRCW0603100KFKEAC?qs=E3Y5ESvWgWPxzfNYyMgX1w%3D%3D, Supplier 1=Mouser
R12: library part CRCW060324K9FKEA, "Resistor", Manufacturer_Name=Vishay, Mouser Part Number=71-CRCW0603-24.9K-E3, Supplier Part Number 1=71-CRCW0603-15.8K, Arrow Part Number=CRCW060324K9FKEA, Arrow Price/Stock=https://www.arrow.com/en/products/crcw060324k9fkea/vishay, Datasheet Link=http://www.vishay.com/docs/20035/dcrcwe3.pdf, Height=0.5mm, Manufacturer_Part_Number=CRCW060324K9FKEA, Mouser Price/Stock=https://www.mouser.co.uk/ProductDetail/Vishay-Dale/CRCW060324K9FKEA?qs=duauLwvczSYlbxc75y0kVA%3D%3D, Supplier 1=Mouser
R13: library part CRCW06038K87FKEA, "Resistor", Manufacturer_Name=Vishay, Mouser Part Number=71-CRCW0603-8.87K-E3, Supplier Part Number 1=71-CRCW060326K7FKEB, Arrow Part Number=CRCW06038K87FKEA, Arrow Price/Stock=https://www.arrow.com/en/products/crcw06038k87fkea/vishay, Datasheet Link=http://www.vishay.com/docs/20035/dcrcwe3.pdf, Height=0.5mm, Manufacturer_Part_Number=CRCW06038K87FKEA, Mouser Price/Stock=https://www.mouser.co.uk/ProductDetail/Vishay-Dale/CRCW06038K87FKEA/?qs=CuWZN%2F5Vbiq36sz1Lp02wA%3D%3D, Supplier 1=Mouser
R14 R15: library part CRCW06030000ZSTB, "Resistor", Manufacturer_Name=Vishay, Mouser Part Number=71-CRCW0603000ZT-RT5, Supplier Part Number 1=71-CRCW06030000Z0EAH, Arrow Part Number=CRCW06030000ZSTB, Arrow Price/Stock=https://www.arrow.com/en/products/crcw06030000zstb/vishay?region=nac, Datasheet Link=http://www.vishay.com/docs/20035/dcrcwe3.pdf, Height=0.5mm, Manufacturer_Part_Number=CRCW06030000ZSTB, Mouser Price/Stock=https://www.mouser.co.uk/ProductDetail/Vishay-Dale/CRCW06030000ZSTB?qs=2ymmDbJkxOjBfbAlbZJVUA%3D%3D, Parameter 1=0, Supplier 1=Mouser
R30: "Resistor", Manufacturer_Name=Vishay, Mouser Part Number=71-CRCW0603-8.87K-E3, Arrow Part Number=CRCW06038K87FKEA, Arrow Price/Stock=https://www.arrow.com/en/products/crcw06038k87fkea/vishay, Datasheet Link=http://www.vishay.com/docs/20035/dcrcwe3.pdf, Height=0.5mm, Manufacturer_Part_Number=CRCW06038K87FKEA, Mouser Price/Stock=https://www.mouser.co.uk/ProductDetail/Vishay-Dale/CRCW06038K87FKEA/?qs=CuWZN%2F5Vbiq36sz1Lp02wA%3D%3D, Supplier 1=Mouser, Supplier Part Number 1=71-CRCW0603-8.87K-E3

## Free pads (board coordinates)
  rrect50% 5x2 smd far side: 6(7.6,55.8) 6(7.6,34.2)

## Via types
v1: diameter 1, hole 0.6, Top Layer to Bottom Layer, 363 vias
v2: diameter 0.7, hole 0.3, Top Layer to Bottom Layer, 64 vias
v3: diameter 0.5, hole 0.3, Top Layer to Bottom Layer, 32 vias
v4: diameter 5, hole 3, Top Layer to Bottom Layer, 2 vias

## Nets (pads, with @x,y where several pads share a name; then routed paths per layer and width w, separated by ;. In a path a pad name is that pad's centre, name@x,y a point inside that pad or via, vN(x,y) a via of type N, cw(c..) or ccw(c..) an arc to the next point about the centre after c; other vN are vias at no path point)
24V: C6.1 C8.1 C10.2 C12.2 C13.2 C16.2 C35.1 IC1.24 J1.5 Q1.1 Q1.2 Q1.3 Q1.4 R3.2 | length 33.6
  Top Layer w0.254: R3.2 35.8,43.375 35.427,43.002 35.252,43.002 v2(34.5,42.25) 34.5,39.933 35.308,39.125 38,39.125 IC1.24
  Bottom Layer w0.254: 18.25,46.25 19.25,47.25 34,47.25 34.5,46.75 v2(34.5,42.25)
24V_COMP: C19.2 IC1.20 R4.2 | length 5.4
  Top Layer w0.15: R4.2 37.375,41.375 C19.2 38.925,41.375 39.575,42.025 40.897,42.025 41.197,41.725 IC1.20
24V_CTRL: IC1.9 J1.6 R2.1 R30.2 | length 62.6
  Top Layer w0.15: J1.6@6.985,40 8.175,40 9.365,40 11.25,40 v2(11.5,39.75) ; IC1.9 48.185,41.735 49.037,41.735 49.345,42.042 49.448,42.145 51.905,42.145 52.075,41.975 52.075,41.95 52.475,41.55 53.95,41.55 R30.2 54,42.406 v2(53.575,42.831)
  Bottom Layer w0.15: v2(11.5,39.75) 12.5,40.75 12.5,42.75 17.636,47.886 17.9,47.886 48.498,47.798 ccw(c48.5,48.423) 48.511,47.798 51.033,47.842 51.158,47.842 53.575,45.425 v2(53.575,42.831)
24V_FB: C20.2 IC1.19 R3.1 R6.1 | length 7.7
  Top Layer w0.15: R3.1 35.85,44.975 36.91,43.915 36.91,43.79 37.225,43.475 C20.2 38.775,43.475 R6.1 38.9,43.425 39.95,42.375 IC1.19
24V_RT: IC1.21 R5.2 | length 2.1
  Top Layer w0.15: R5.2 40.675,41.075 41.212,41.075 IC1.21
48V: C25.1 C28.2 C29.2 C30.2 C31.2 J1.2 Q5.5 Q5.6 Q5.7 Q5.8 Q5.9 R8.2 | length 14.7
  Top Layer w0.15: R8.2 52.125,54.55 52.8,55.225 53.975,55.225 54.412,55.662 54.412,65.838 54.25,66 54.25,66.5
  other v1: 28.6,66.9 29.8,66.9 31,66.9 32.2,66.9 33.4,66.9 34.6,66.9 35.8,66.9 37,66.9 46.6,66.9 47.8,66.9 49,66.9 50.2,66.9 51.4,66.9 52.6,66.9 53.8,66.9 29.2,68.1 30.4,68.1 31.6,68.1 32.8,68.1 34,68.1 35.2,68.1 36.4,68.1 46,68.1 47.2,68.1 48.4,68.1 49.6,68.1 50.8,68.1 52,68.1 53.2,68.1 28.6,69.3 29.8,69.3 31,69.3 32.2,69.3 33.4,69.3 34.6,69.3 35.8,69.3 37,69.3 44.2,69.3 45.4,69.3 46.6,69.3 47.8,69.3 49,69.3 50.2,69.3 51.4,69.3 52.6,69.3 53.8,69.3 29.2,70.5 30.4,70.5 31.6,70.5 32.8,70.5 34,70.5 35.2,70.5 43.6,70.5 44.8,70.5 46,70.5 47.2,70.5 48.4,70.5 49.6,70.5 50.8,70.5 52,70.5 53.2,70.5 28.6,71.7 29.8,71.7 31,71.7 32.2,71.7 33.4,71.7 34.6,71.7
48V_COMP: C32.1 C33.1 IC3.16 | length 10.7
  Top Layer w0.15: IC3.16 48.15,52.75 48.4,53 49.026,53 49.226,53.2 v2(50,53.2) ; v2(52.6,53.7) 52.725,53.7 53.525,54.5 53.675,54.5 54.025,54.15 54.025,54.075 54.35,53.75 54.35,52.329 54.036,52.015 53.915,52.015 C32.1
  Bottom Layer w0.15: v2(50,53.2) 52.1,53.2 v2(52.6,53.7)
48V_CTRL: IC3.11 J1.1 R7.1 R10.2 | length 52.1
  Top Layer w0.15: J1.1@7,50 J1.1@8.175,50 ; v2(7.5,51.5) 8.175,50.825 J1.1@8.175,50 ; J1.1@9.365,50 J1.1@8.175,50 ; IC3.11 46,49.819 46.465,49.354 46.465,48.216 46.756,47.925 46.9,47.925 47.25,47.575 R10.2 R7.1 48.5,47.55 v2(48.5,48.423)
  Bottom Layer w0.15: v2(7.5,51.5) 15,51.5 17.706,48.794 v2(48.5,48.423)
48V_FB: IC3.15 R8.1 R11.2 | length 5.3
  Top Layer w0.15: IC3.15 48.031,52.25 48.331,52.55 50.7,52.55 50.9,52.75 R8.1 R11.2
48V_RT: IC3.7 R13.2 | length 2.3
  Top Layer w0.15: R13.2 43,49.475 43.725,50.2 43.925,50.2 44,50.275 IC3.7
BG: IC3.21 Q6.4 | length 32
  Top Layer w0.25: v2(36.9,81) 36.975,81 37.415,80.56 Q6.4 ; IC3.21 v2(45.5,55.475)
  Bottom Layer w0.25: v2(36.9,81) 36.9,74.15 36.25,73.5 36.25,72.5 45.5,63.25 v2(45.5,55.475)
GND: C1.2 C2.1 C3.1 C4.1 C5.1 C6.2 C8.2 C10.1 C11.2 C12.1 C13.1 C14.2 C15.2 C16.1 C19.1 C20.1 C21.1 C22.2 C23.2 C24.2 C25.2 C26.1 C27.2 C28.1 C29.1 C30.1 C31.1 C32.2 C35.2 IC1.10 IC1.14 IC1.15 IC1.22 IC1.23 IC1.29 IC3.8 IC3.9 IC3.10 IC3.23 IC3.24 IC3.25 J1.4 J1.MH Q3.5 Q3.6 Q3.7 Q4.5 Q4.6 Q4.7 Q6.1 Q6.2 Q6.3 R5.1 R6.2 R10.1 R11.1 R12.2 R13.1 R15.2 R30.1 | length 25
  Top Layer w0.254: v3(18.225,56.925) 18.25,56.95 C25.2@18.25,57.75 ; v3(26,51) 27.655,51 ; v2(27.25,51.5) 27.655,51.095 27.655,51 ; v2(29.75,51.5) 29.75,51.45 30.2,51 ; v2(32.25,51.5) 32.213,51.5 31.715,51.002 31.002,51.002 v3(31,51) 30.2,51 ; C21.1 35.875,41.4 36.587,40.688 38.012,40.688 38.725,39.975 C19.1 40.275,39.975 R5.1 41.675,39.925 41.825,39.775 IC1.23 ; R10.1 45.75,48.7 C15.2 ; 27.655,51 v3(28.5,51) 30.2,51
  Bottom Layer w0.254: v3(33.5,49.682) v3(38.5,49.682) ; v3(44,33) v3(46,35)
  other v1: 43.6,11.7 44.8,11.7 46,11.7 47.2,11.7 48.4,11.7 49.6,11.7 50.8,11.7 52,11.7 53.2,11.7 44.2,12.9 45.4,12.9 46.6,12.9 47.8,12.9 49,12.9 50.2,12.9 51.4,12.9 52.6,12.9 53.8,12.9 43.6,14.1 44.8,14.1 46,14.1 47.2,14.1 48.4,14.1 49.6,14.1 50.8,14.1 52,14.1 53.2,14.1 44.2,15.3 45.4,15.3 46.6,15.3 47.8,15.3 49,15.3 50.2,15.3 51.4,15.3 52.6,15.3 53.8,15.3 44.8,16.5 46,16.5 47.2,16.5 48.4,16.5 49.6,16.5 50.8,16.5 52,16.5 53.2,16.5 44.2,17.7 45.4,17.7 46.6,17.7 47.8,17.7 49,17.7 50.2,17.7 51.4,17.7 52.6,17.7 53.8,17.7 46,18.9 48.4,18.9 49.6,18.9 52,18.9 34,52.5 35.2,52.5 36.4,52.5 33.4,53.7 34.6,53.7 35.8,53.7 34,54.9 35.2,54.9 33.4,56.1 34.6,56.1 35.8,56.1 37,56.1 38.2,56.1 34,57.3 35.2,57.3 36.4,57.3 37.6,57.3 38.8,57.3 50.8,57.3 52,57.3 33.4,58.5 34.6,58.5 35.8,58.5 37,58.5 38.2,58.5 39.4,58.5 40.6,58.5 41.8,58.5 43,58.5 50.2,58.5 51.4,58.5 52.6,58.5 34,59.7 35.2,59.7 36.4,59.7 37.6,59.7 38.8,59.7 40,59.7 41.2,59.7 42.4,59.7 43.6,59.7 50.8,59.7 52,59.7 33.4,60.9 34.6,60.9 35.8,60.9 37,60.9 38.2,60.9 39.4,60.9 40.6,60.9 41.8,60.9 43,60.9 50.2,60.9 51.4,60.9 52.6,60.9 34,62.1 35.2,62.1 36.4,62.1 37.6,62.1 38.8,62.1 40,62.1 41.2,62.1 42.4,62.1 43.6,62.1 50.8,62.1 52,62.1 33.4,63.3 34.6,63.3 35.8,63.3 37,63.3 38.2,63.3 39.4,63.3 40.6,63.3 41.8,63.3 50.2,63.3 51.4,63.3 52.6,63.3 39.4,83.7 40.6,83.7 41.8,83.7 43,83.7 44.2,83.7 45.4,83.7 46.6,83.7 47.8,83.7 49,83.7 50.2,83.7 53.8,83.7 40,84.9 41.2,84.9 42.4,84.9 43.6,84.9 44.8,84.9 46,84.9 47.2,84.9 48.4,84.9 39.4,86.1 40.6,86.1 41.8,86.1 43,86.1 44.2,86.1 45.4,86.1 46.6,86.1 47.8,86.1 40,87.3 41.2,87.3 42.4,87.3 43.6,87.3 44.8,87.3 46,87.3 47.2,87.3 48.4,87.3 39.4,88.5 40.6,88.5 41.8,88.5 43,88.5 44.2,88.5 45.4,88.5 46.6,88.5 47.8,88.5
  other v2: 33,43.25 33,45.75 45.75,46.25 48.25,46.25 50.75,46.25 35.75,47 38.25,47 40.75,47 43.25,47 34.75,51.5 37.25,51.5 44.75,57.75 44.75,59 48.75,59 44.75,60.25 48.75,60.25 44.75,61.5 48.75,61.5 44.75,62.75 48.75,62.75 48.75,64 43.313,64.031
  other v3: 43,34 45,36 33.5,51 36,51 38.5,51 19.021,54.021 20.021,55.021 17.021,56.021 15,58 16.021,59.021
HDRV1: IC1.4 Q2.8 | length 22.1
  Top Layer w0.25: v2(38.5,22) 38.5,22.105 38.92,22.525 Q2.8 ; v2(47.2,35.2) 47.2,36.591 47,36.791 47,38.06 47.315,38.375 48.075,38.375 IC1.4
  Bottom Layer w0.25: v2(38.5,22) 38.5,26.095 47.114,34.709 47.114,35.114 v2(47.2,35.2)
HDRV2: IC1.25 Q1.8 | length 54.8
  Top Layer w0.25: Q1.8 39.096,5.337 39.25,5.183 v2(39.25,5.061) ; IC1.25 42.425,38.375 43.185,38.375 43.5,38.06 43.5,36.791 43.3,36.591 v2(43.3,35.2)
  Bottom Layer w0.25: v2(39.25,5.061) 40.6,6.411 40.6,12.4 39.5,13.5 30.5,13.5 28.5,15.5 28.5,22.75 41.75,36 42.95,36 43.262,35.688 43.262,35.238 v2(43.3,35.2)
ILIM: IC3.3 R14.1 R15.1 | length 6
  Top Layer w0.15: R15.1 R14.1 39.175,53.65 39.525,53.3 39.525,53.066 39.841,52.75 IC3.3
IVCC: C11.1 D1.2 IC3.5 IC3.17 IC3.22 R14.2 | length 21.6
  Top Layer w0.15: IC3.17 48,53.25 v2(48.5,53.75)
  Top Layer w0.25: R14.2 39.115,52.135 40.285,52.135 C11.1 ; C11.1@41,51.67 41.049,51.719 v2(42.316,51.719) 42.944,51.719 42.95,51.725 43,51.725 43.025,51.75 IC3.5 ; v2(42.2,55.2) 42.2,55.3 43,56.1 ; D1.2@43,56.25 43,56.1 ; IC3.22 44.975,54.475 44.975,54.969 44.656,55.288 43.812,55.288 43,56.1
  Bottom Layer w0.15: v2@42.258,55.142 42.371,55.142 43.763,53.75 v2(48.5,53.75)
  Bottom Layer w0.25: v2(42.2,55.2) 43.706,53.694 43.721,53.679 43.721,53.125 v2(42.316,51.719)
LDRV1: IC1.1 Q3.8 | length 22.5
  Top Layer w0.25: v2(48.1,35.2) 48.1,36.45 IC1.1
  Top Layer w0.254: Q3.8 42.45,21.225 v2(43.225,22)
  Bottom Layer w0.25: v2(43.225,22) 40.75,22 39.5,23.25 39.5,26.6 v2(48.1,35.2)
LDRV2: IC1.28 Q4.8 | length 41.2
  Top Layer w0.25: v2(41.922,12.328) 41.922,12.206 42.086,12.042 Q4.8 ; IC1.28 42.4,36.45 v2(42.4,35.2)
  Bottom Layer w0.25: v2(41.922,12.328) 39.75,14.5 30.5,14.5 29.5,15.5 29.5,22.3 v2(42.4,35.2)
LSN: C34.1 IC1.6 L2.2 R1.2 | length 33.6
  Top Layer w0.15: R1.2 31.25,19.75 31.572,20.072 31.572,20.914 31.3,21.185 v2(31.3,21.3)
  Top Layer w0.25: IC1.6 48.25,39.7 C34.1 50.05,39.75 v2(51.25,39.75)
  Bottom Layer w0.15: v2(31.3,21.3) 31.3,21.308 32.016,22.023 32.016,22.194 49.321,39.5 50.887,39.5 51.137,39.75 v2(51.25,39.75)
NetC9_1: C9.1 D1.1 IC3.20 | length 4.9
  Top Layer w0.15: D1.1@45.35,56.65 C9.1
  Top Layer w0.25: D1.1 45.35,56.65 46.075,55.925 46.075,55.162 46.025,55.112 46.025,54.475 IC3.20
NetC15_1: C15.1 IC3.12 | length 2.1
  Top Layer w0.15: IC3.12 46.5,49.875 46.885,49.49 46.885,49.065 C15.1
NetC17_1: C17.1 IC1.2 | length 2.5
  Top Layer w0.15: IC1.2 48.325,37.025 48.906,37.025 49.616,36.315 49.616,36.115 49.931,35.8 C17.1
NetC18_2: C18.2 IC1.27 | length 2.3
  Top Layer w0.15: C18.2 41.04,36.475 41.59,37.025 42.175,37.025 IC1.27
NetC21_2: C21.2 R4.1 | length 1.6
  Top Layer w0.15: C21.2 37.25,40 R4.1
NetC23_1: C23.1 IC1.8 | length 2.3
  Top Layer w0.25: IC1.8 50.495,41.075 C23.1@50.5,41.08
NetC24_1: C24.1 IC1.11 IC1.12 IC1.13 | length 5.9
  Top Layer w0.15: IC1.13 IC1.12 IC1.11 48.675,43.025 48.9,43.25 51.75,43.25 52.3,42.7 C24.1
NetC26_2: C26.2 IC1.18 | length 2.2
  Top Layer w0.15: C26.2 40.64,43.16 41.14,43.16 41.275,43.025 IC1.18
NetC33_2: C33.2 R12.1 | length 1.9
  Top Layer w0.15: R12.1@52.35,51.7 52.45,51.7 53.175,52.425 53.175,52.65 53.525,53 C33.2
S+: C7.2 IC3.14 L1.1 R9.2 | length 46.3
  Top Layer w0.15: R9.2 12.25,60.45 12.5,60.2 13.4,60.2 13.7,60.5 v2(13.8,60.5) ; IC3.14 48.7,51.75 C7.2 48.85,51.7 49.377,51.173 v2(49.873,51.173)
  Bottom Layer w0.15: v2(13.8,60.5) 13.8,60.42 23.762,50.457 49.157,50.457 v2(49.873,51.173)
SW: C9.2 IC3.18 L1.2 Q5.1 Q5.2 Q5.3 Q6.5 Q6.6 Q6.7 Q6.8 Q6.9 | length 26.2
  Top Layer w0.15: IC3.18 47.475,53.75 47.55,53.825 47.55,54.255 48.7,55.405 C9.2@48.7,56.25
  Bottom Layer w0.15: v2(41.75,75.5) 41.75,69.75 47.5,64 47.5,56.705 v2(48.75,55.455)
  other v1: 27.4,75.3 28.6,75.3 29.8,75.3 31,75.3 32.2,75.3 33.4,75.3 34.6,75.3 28,76.5 29.2,76.5 30.4,76.5 31.6,76.5 32.8,76.5 34,76.5 35.2,76.5 27.4,77.7 28.6,77.7 29.8,77.7 31,77.7 32.2,77.7 33.4,77.7 34.6,77.7 28,78.9 29.2,78.9 30.4,78.9 31.6,78.9 32.8,78.9 34,78.9 35.2,78.9 28.6,80.1 29.8,80.1 31,80.1 32.2,80.1 33.4,80.1 34.6,80.1
SW1: C17.2 C34.2 IC1.3 IC1.5 Q2.5 Q2.6 Q2.7 Q3.1 Q3.2 Q3.3 Q3.4 R1.1 | length 62.5
  Top Layer w0.15: v2(32.266,21.306) 32.266,21.294 31.922,20.95 31.922,20.077 32.199,19.8 33.2,19.8 R1.1 ; IC1.3 48.325,37.675 49.425,37.675 49.9,37.2 v2(50,37.2)
  Top Layer w0.25: IC1.5 48.275,39.025 49.206,39.025 49.635,38.596 49.635,38.565 49.645,38.555 C34.2@49.891,38.555 ; C34.2@49.981,38.5 50.046,38.565 50.376,38.565 50.694,38.883 v2(51.279,38.883)
  Bottom Layer w0.15: v2(32.266,21.306) 32.266,22.091 33.475,23.3 49.425,39.25 50.912,39.25 v2(51.279,38.883) ; v2(38.723,27.272) 39.925,28.475 40.314,28.475 46.575,34.736 46.575,35.475 47,35.9 48.7,35.9 v2(50,37.2)
  Bottom Layer w0.25: v3(33,24) v3(37,28) ; v3(34,23) v3(38,27)
  other v1: 32.2,16.5 33.4,16.5 34.6,16.5 35.8,16.5 37,16.5 38.2,16.5 39.4,16.5 32.8,17.7 34,17.7 35.2,17.7 36.4,17.7 37.6,17.7 38.8,17.7 40,17.7 34.6,18.9 35.8,18.9 37,18.9 35.2,20.1 36.4,20.1 37.6,20.1
  other v3: 36,25 35,26
SW2: C18.1 IC1.26 L2.1 Q1.5 Q1.6 Q1.7 Q4.1 Q4.2 Q4.3 Q4.4 | length 33.9
  Top Layer w0.15: v2(41,38.448) 40.998,38.448 40.425,37.875 42.275,37.875 IC1.26
  Bottom Layer w0.15: 29.5,13.5 27.75,15.25 27.75,23.75 41.05,37.05 41.05,38.398 v2(41,38.448)
  other v1: 22.6,6.9 29.8,6.9 31,6.9 32.2,6.9 33.4,6.9 34.6,6.9 35.8,6.9 37,6.9 30.4,8.1 31.6,8.1 32.8,8.1 34,8.1 35.2,8.1 36.4,8.1 37.6,8.1 22.6,9.3 31,9.3 32.2,9.3 33.4,9.3 34.6,9.3 35.8,9.3 37,9.3 30.4,10.5 31.6,10.5 32.8,10.5 34,10.5 35.2,10.5 36.4,10.5 37.6,10.5 22.6,11.7 29.8,11.7 31,11.7 32.2,11.7 33.4,11.7 34.6,11.7 35.8,11.7 37,11.7
TG: IC3.19 Q5.4 | length 24.6
  Top Layer w0.25: v2(37,73) 38.035,73 Q5.4 ; IC3.19 46.525,54.475 46.525,54.75 47.124,55.349 47.416,55.349 v2(47.502,55.435)
  Bottom Layer w0.25: v2(37,73) 37.033,73 46.5,63.533 46.5,56.436 v2(47.502,55.435)
V_bat: C1.1 C2.2 C3.2 C4.2 C5.2 C7.1 C14.1 C22.1 C27.1 IC1.7 IC3.1 IC3.13 J1.3 Q2.1 Q2.2 Q2.3 Q2.4 R2.2 R7.2 R9.1 | length 121
  Top Layer w0.15: R9.1 12.3,58.55 12.3,59.6 12.5,59.8 13.362,59.8 13.656,59.505 v2(13.805,59.505) ; IC3.13 47.8,51.25 48.335,50.715 48.335,50.615 48.65,50.3 C7.1 48.85,50.3 48.872,50.322 v2(49.89,50.322) ; v2(49.37,48.979) 49.37,48.83 49.65,48.551 49.65,47.9 R7.2
  Top Layer w0.25: C14.1@41.4,53.6 v2(42.323,53.6) 42.33,53.6 42.48,53.75 IC3.1 ; IC1.7 48.235,40.365 51.685,40.365 R2.2@52.1,39.95 ; C22.1@51.7,37.25 51.735,37.285 51.735,37.735 52.353,38.353 52.353,38.865 v2(52.36,38.872) ; v2@52.36,38.75 52.36,39.81 R2.2
  Top Layer w0.254: C14.1 41.4,53.6 C14.1@41.4,53.4
  Bottom Layer w0.15: v2(13.805,59.505) 13.824,59.486 14.38,59.486 23.659,50.207 49.628,50.207 49.742,50.322 v2(49.89,50.322)
  Bottom Layer w0.25: v3(23,50) 23.048,49.952 23.348,49.952 23.551,49.75 v3(26,49.75) v3(28.5,49.75) v3(31,49.75) ; v3(39,30) v3(41,32) ; v3(40,29) v3(42,31) ; v2(49.37,48.979) 49.294,48.903 51.847,48.903 54.25,46.5 54.25,40.123 53.548,39.421 52.886,39.421 52.36,38.895 v2(52.36,38.872)
  Bottom Layer w0.254: v2(30.25,49.5) 30.371,49.5 30.696,49.174 30.771,49.1 49.122,49.1 v2@49.28,48.979 ; v2(42.323,53.6) 41.639,52.916 41.639,51.438 42.035,51.042 48.542,51.042 49.5,52 50.25,52 50.7,51.55 50.7,50.397 v2@49.281,48.978
  other v1: 43.6,24.9 44.8,24.9 46,24.9 47.2,24.9 48.4,24.9 49.6,24.9 50.8,24.9 52,24.9 53.2,24.9 43,26.1 44.2,26.1 45.4,26.1 46.6,26.1 47.8,26.1 49,26.1 50.2,26.1 51.4,26.1 52.6,26.1 53.8,26.1 43.6,27.3 44.8,27.3 46,27.3 47.2,27.3 48.4,27.3 49.6,27.3 50.8,27.3 52,27.3 53.2,27.3
pads on no net: IC1.16 IC1.17 IC3.2 IC3.4 IC3.6 L2.MP1
copper on no net:
  other v4: 52,3 52,87

## Polygon pours and split planes (outlines as drawn)
GND on Top Layer "GND_L01_P019" (solid, pour order 19): 0.25,0.5 0.5,0.25 28,0.25 28.25,0.5 28.25,89.5 28,89.75 0.5,89.75 0.25,89.5
GND on Top Layer "GND_L01_P017" (solid, pour order 17): 32.25,65.25 32,65 32,41.75 45.25,28.5 54.5,28.5 54.75,28.75 54.75,65 54.5,65.25
V_bat on Top Layer "V_BAT_L01_P015" (solid, pour order 15): 33.25,28.75 37.548,28.75 38,28.75 38.035,28.75 39.75,28.75 40.25,28.25 40.25,22.5 40.5,22.25 54.5,22.25 54.75,22.5 54.75,28 54.5,28.25 45.25,28.25 31.75,41.75 31.75,50.25 31.5,50.5 12.75,50.5 12.5,50.25 12.5,47 12.25,46.75 8,46.75 8,45.25 14.75,45.25 15,45.5 15,47.25 15.25,47.5 26,47.5 26.25,47.25 26.25,40.75 33,34 33,29
48V on Top Layer "48V_L01_P014" (solid, pour order 14): 6.25,47 6,47.25 6,48.75 6.25,49 10.5,49 10.75,49.25 10.75,52.25 11,52.5 21.75,52.5 22.25,53 22.25,55.5 31.5,55.5 31.75,55.25 31.75,51 31.5,50.75 12.5,50.75 12.25,50.5 12.25,47.25 12,47
48V on Top Layer "48V_L01_P012" (solid, pour order 12): 54.75,74 28,74 27.25,73.25 27.25,60.5 27,60.25 22.5,60.25 22.25,60 22.25,55.5 22.5,55.25 31.5,55.25 31.75,55.5 31.75,65.25 32,65.5 54.5,65.5 54.75,65.75
SW1 on Top Layer "SW1_L01_P004" (solid, pour order 4): 33.25,28.5 39.75,28.5 40,28.25 40,21.5 40.187,21.313 41.097,21.313 41.25,21.16 41.25,15 41,14.75 31,14.75 30.75,15 30.75,18.25 31,18.5 32.5,18.5 33,19 33,28.25
24V on Top Layer "24V_L01_P018" (solid, pour order 18): 6.5,43 6.25,42.75 6.25,41.25 6.5,41 15.75,41 15.75,44.75 15.5,45 10.5,45 10.25,44.75 10.25,43.25 10,43
GND on Top Layer "GND_L01_P016" (solid, pour order 16): 21,47 21.25,47.25 25.75,47.25 26,47 26,40.75 32.75,34 32.75,23.75 32.5,23.5 21.25,23.5 21,23.75
V_bat on Top Layer "V_BAT_L01_P013" (solid, pour order 13): 8.25,46.75 6,46.75 5.75,47 5.75,52.5 6,52.75 13.25,52.75 13.5,53 13.5,58.75 13.25,59 4.25,59 4,58.75 4,45.5 4.25,45.25 8.25,45.25
SW on Top Layer "SW_L01_P011" (solid, pour order 11): 38.75,74.5 38.75,72.25 39,72 42,72 42.25,72.25 42.25,74.5
GND on Top Layer "GND_L01_P010" (solid, pour order 10): 38,89.5 38.25,89.75 54.5,89.75 54.75,89.5 54.75,74.25 54.5,74 38,74
SW on Top Layer "SW_L01_P009" (solid, pour order 9): 19.25,89.75 37.5,89.75 37.75,89.5 37.75,79.75 38,79.5 42.25,79.5 42.25,73.75 42,73.5 19.25,73.5 19,73.75 19,89.5
S+ on Top Layer "S+_L01_P008" (solid, pour order 8): 9.5,61 15,61 15.125,61.125 15.125,66 9.375,66 9.375,61.125
24V on Top Layer "24V_L01_P005" (solid, pour order 5): 15.25,0.5 15.5,0.25 20,0.25 20.75,1 20.75,47 20.5,47.25 15.5,47.25 15.25,47
24V on Top Layer "24V_L01_P001" (solid, pour order 1): 15.25,8.25 15.5,8.5 54.5,8.5 54.75,8.25 54.75,0.5 54.5,0.25 15.5,0.25 15.25,0.5
SW2 on Top Layer "SW2_L01_P000" (solid, pour order 0): 41.25,6.25 41,6 21.25,6 21,6.25 21,14.25 21.25,14.5 41,14.5 41.25,14.25
LSN on Top Layer "LSN_L01_P003" (solid, pour order 3): 21.25,14.75 21,15 21,23 21.25,23.25 30.25,23.25 30.5,23 30.5,15 30.25,14.75
GND on Top Layer "GND_L01_P002" (solid, pour order 2): 41.75,8.75 41.5,9 41.5,21.75 41.75,22 54.5,22 54.75,21.75 54.75,9 54.5,8.75
GND on Bottom Layer "GND_L02_P028" (solid, pour order 28): 0.5,89.75 0.25,89.5 0.25,0.5 0.5,0.25 25.75,0.25 26,0.5 26,89.35 25.6,89.75
GND on Bottom Layer "GND_L02_P022" (solid, remove dead copper, pour order 22): 54.75,65 54.5,65.25 26.5,65.25 26.25,65 26.25,22.5 26.368,22.382 54.632,22.382 54.75,22.5
V_bat on Bottom Layer "V_BAT_L02_P020" (solid, pour order 20): 40.837,22.382 39.831,23.387 39.831,25.363 45.719,31.25 54.5,31.25 54.75,31 54.75,22.5 54.406,22.156
GND on Bottom Layer "GND_L02_P030" (solid, pour order 30): 25.25,46.75 26.75,46.75 26.75,34.75 25.25,34.75
GND on Bottom Layer "GND_L02_P029" (solid, pour order 29): 25.5,5.5 25.5,0.25 54.5,0.25 54.75,0.5 54.75,21.75 54.5,22 43.75,22 42.74,20.99 42.74,12.24 41,10.5 41,6 40.5,5.5
SW2 on Bottom Layer "SW2_L02_P027" (solid, pour order 27): 21.25,14.5 21,14.25 21,6.25 21.25,6 41,6 41.25,6.25 41.25,14.25 41,14.5
SW1 on Bottom Layer "SW1_L02_P026" (solid, pour order 26): 30.25,22 30,21.75 30,16 31,15 42.25,15 42.5,15.25 42.5,21.75 42.25,22
GND on Bottom Layer "GND_L02_P025" (solid, pour order 25): 54.75,82.25 54.442,81.942 19,81.942 19,89.75 54.5,89.75 54.75,89.5
SW on Bottom Layer "SW_L02_P024" (solid, pour order 24): 54.811,73.984 54.561,73.734 26.666,73.734 26.311,74.089 26.311,81.484 26.473,81.647 54.353,81.647 54.811,81.189
48V on Bottom Layer "48V_L02_P021" (solid, pour order 21): 54.811,65.811 54.484,65.484 26.561,65.484 26.311,65.734 26.311,73.061 26.647,73.397 54.639,73.397 54.811,73.225

## Silkscreen, mask and mechanical layers (free items; w line width, h text height)
Bottom Overlay:
  drawing of 179 lines, arcs and shapes, not listed
  text "HVPowerModule V3IT3R01" at 1.955,37.51 h1.7 r270